# Altium PCB tkhtn.PcbDoc
Units mil, origin at the board's own origin, x right, y up, seen from the top; angles counter-clockwise.
Board outline 6000 x 4000 mil, 2 copper layers (Top Layer, Bottom Layer); 33 components, 30 nets, 170 pads, 0 vias.
Unrouted connection lines stored in the file: 10.
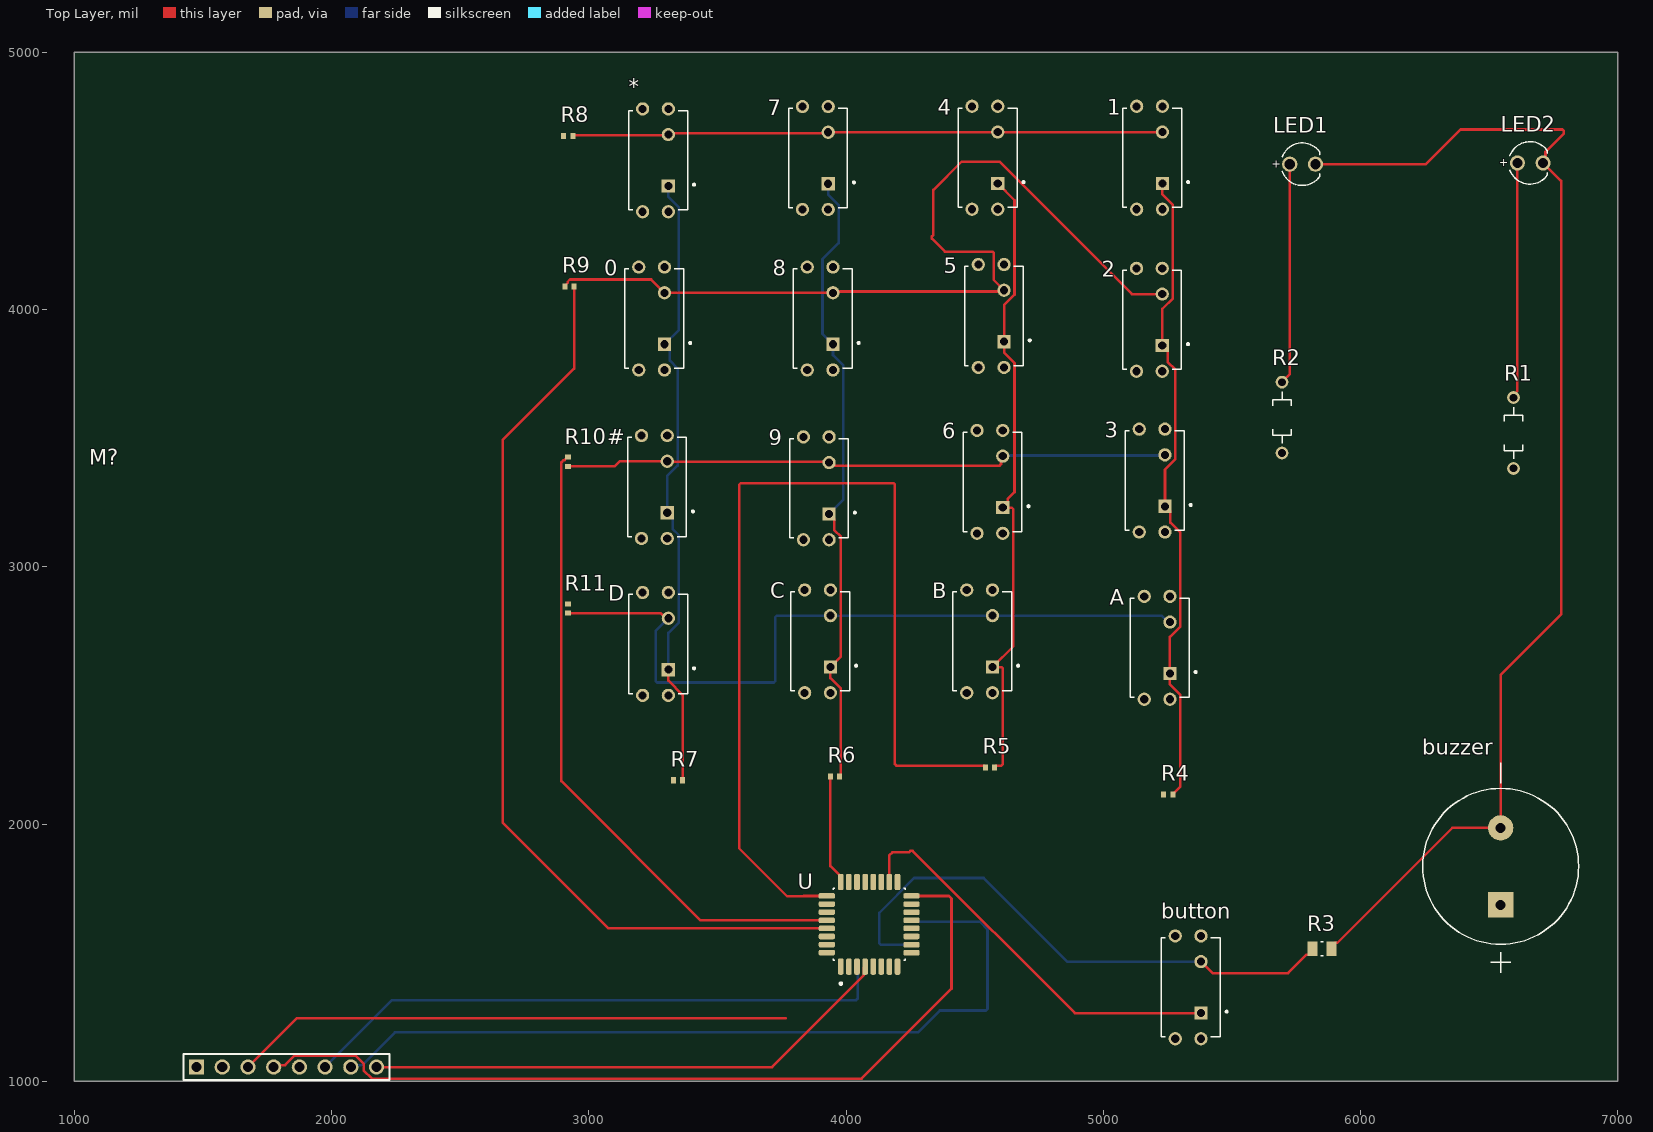
[diagram p0: Top Layer view]
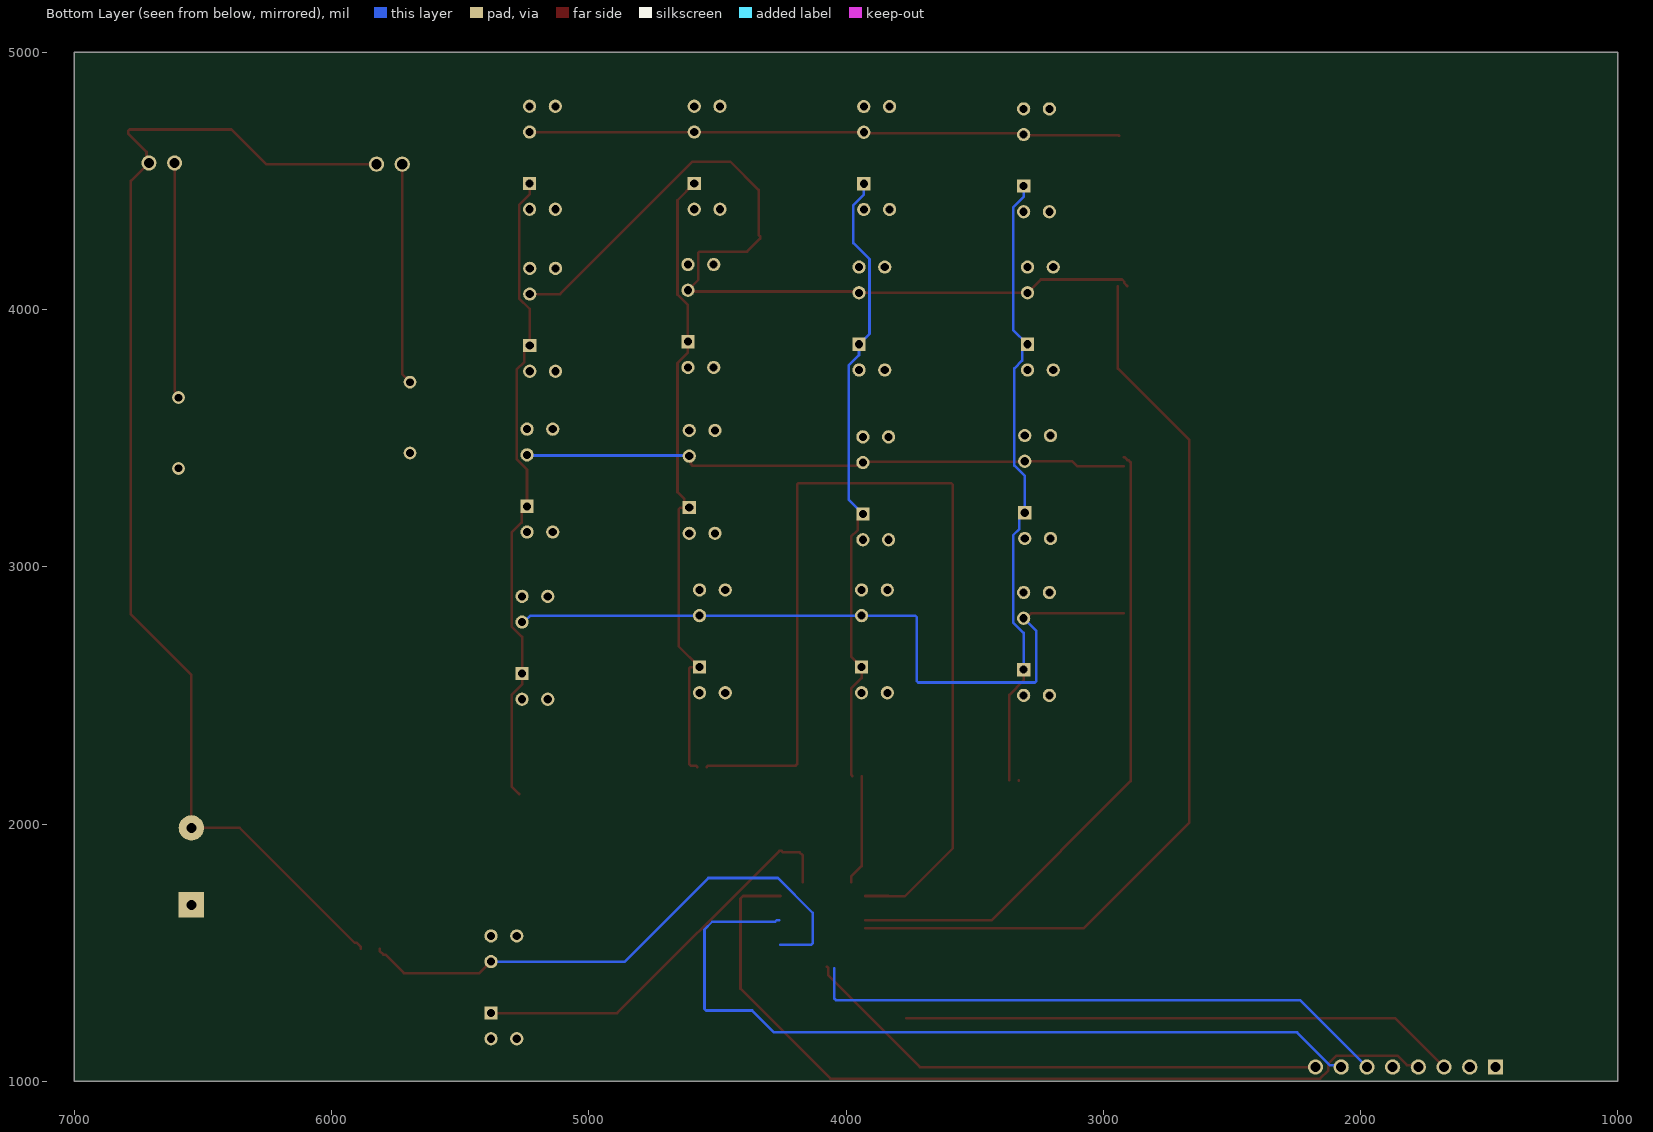
[diagram p1: Bottom Layer view, seen from below]

## Layer stack, top to bottom
Top Solder: solder mask 0.4, Solder Resist, Dk 3.5
Top Layer: signal copper 1.4
Dielectric 1: dielectric 12.6, FR-4, Dk 4.8
Bottom Layer: signal copper 1.4
Bottom Solder: solder mask 0.4, Solder Resist, Dk 3.5

## Board outline
1000,1000 7000,1000 7000,5000 1000,5000

## Design rules (kind name [scope] priority, off if disabled: settings)
Clearance [All] p1: gap=10 ignorepadtopadclearanceinfootprint=FALSE
PolygonConnect [All] p1: connectstyle=Relief reliefconductorwidth=10 reliefentries=4 polygonreliefangle="90 Angle" airgapwidth=10
RoutingVias [All] p1: holewidth=28 width=50 viastyle="Through Hole" minholewidth=28 minwidth=50 maxholewidth=28 maxwidth=50
SolderMaskExpansion [All] p1: expansion=4 istentingtop=FALSE
Width [All] p1: maxlimit=10 minlimit=10 preferedwidth=10
30 further rules are at their usual default settings.

## Components (designator, comment, footprint, x,y, rotation, side; value= is the part's Value field where it differs from the comment)
0 "" SW_MPB01-1B33-SB-D 3255,3965 r90 top
1 "" SW_MPB01-1B33-SB-D 5190.63,4590 r90 top
2 "" SW_MPB01-1B33-SB-D 5190,3960 r90 top
3 "" SW_MPB01-1B33-SB-D 5200.63,3335 r90 top
4 "" SW_MPB01-1B33-SB-D 4550.63,4590 r90 top
5 "" SW_MPB01-1B33-SB-D 4575,3975 r90 top
6 "" SW_MPB01-1B33-SB-D 4570,3330 r90 top
7 "" SW_MPB01-1B33-SB-D 3891.38,4589 r90 top
8 "" SW_MPB01-1B33-SB-D 3910,3965 r90 top
9 "" SW_MPB01-1B33-SB-D 3895,3305 r90 top
# "" SW_MPB01-1B33-SB-D 3265.63,3310 r90 top
* "" SW_MPB01-1B33-SB-D 3270,4580 r90 top
A "" SW_MPB01-1B33-SB-D 5220,2685 r90 top
B "" SW_MPB01-1B33-SB-D 4530,2710 r90 top
button "" SW_MPB01-1B33-SB-D 5340.63,1365 r90 top
buzzer "" XDCR_CPI-1514-12-95T 6545,1835.39 r90 top
C "" SW_MPB01-1B33-SB-D 3900,2710 r90 top
D "" SW_MPB01-1B33-SB-D 3270,2700 r90 top
LED1 "Super Red, 2V, 40°" WL-TMRC_D3.95H5.3 5775,4565 r0 top
LED2 "Bright Green, 2.2V, 60°" WL-TMRC_D3.95H5.3 6660,4570 r0 top
M? "RFID-RC522" RFID-RC522 1825,1055 r0 top
R1 "220ohm" RESAD700W45L350D185 6595,3520 r90 top
R2 "220ohm" RESAD700W45L350D185 5695,3580 r90 top
R3 "1Kohm" RESC2012X65N 5850,1515 r0 top
R4 "100ohm" RESC1005X35N 5252.99,2115 r0 top
R5 "100ohm" RESC1005X35N 4560,2220 r0 top
R6 "100ohm" RESC1005X35N 3957.01,2185 r0 top
R7 "100ohm" RESC1005X35N 3347.01,2170 r0 top
R8 "100ohm" RESC1005X35N 2920,4675 r0 top
R9 "100ohm" RESC1005X35N 2925,4090 r0 top
R10 "100ohm" RESC1005X35N 2920,3407.99 r90 top
R11 "100ohm" RESC1005X35N 2920,2837.99 r90 top
U "ATMEGA328P-AUR" QFP80P900X900X120-32N 4090,1610 r90 top

## Footprints (in the part's own frame and the unit in brackets; to place one, negate y for a bottom-side part, rotate by r counter-clockwise, add the part's x,y. Pads: shape width x height; smd on the part's side, far side on the other; paste and mask are expansions set on the pad)
QFP80P900X900X120-32N [mm]
  rrect53% 1.6x0.55 smd: 1(-4.18,2.8) 2(-4.18,2) 3(-4.18,1.2) 4(-4.18,0.4) 5(-4.18,-0.4) 6(-4.18,-1.2) 7(-4.18,-2) 8(-4.18,-2.8) 17(4.18,-2.8) 18(4.18,-2) 19(4.18,-1.2) 20(4.18,-0.4) 21(4.18,0.4) 22(4.18,1.2) 23(4.18,2) 24(4.18,2.8)
  rrect53% 0.55x1.6 smd: 9(-2.8,-4.18) 10(-2,-4.18) 11(-1.2,-4.18) 12(-0.4,-4.18) 13(0.4,-4.18) 14(1.2,-4.18) 15(2,-4.18) 16(2.8,-4.18) 25(2.8,4.18) 26(2,4.18) 27(1.2,4.18) 28(0.4,4.18) 29(-0.4,4.18) 30(-1.2,4.18) 31(-2,4.18) 32(-2.8,4.18)
  silkscreen extent -5.95,-3.55 3.55,3.55
RESAD700W45L350D185 [mm]
  round 1.258 hole 0.75: 1(-3.5,0) 2(3.5,0)
  silkscreen extent -2.55,-0.92 2.55,0.92
RESC1005X35N [mm]
  rect 0.49x0.6 smd: 1(-0.457,0) 2(0.457,0)
RESC2012X65N [mm]
  rect 1x1.42 smd: 1(-0.935,0) 2(0.935,0)
  silkscreen extent -0.12,-0.7 0.12,0.7
RFID-RC522 [mm]
  rect 1.508x1.508 / inner round 1.508 / far side rect 1.508x1.508 hole 1: 1(-8.89,0)
  round 1.508 hole 1: 2(-6.35,0) 3(-3.81,0) 4(-1.27,0) 5(1.27,0) 6(3.81,0) 7(6.35,0) 8(8.89,0)
  silkscreen extent -10.19,-1.3 10.19,1.3
SW_MPB01-1B33-SB-D [mm]
  rect 1.308x1.308 / inner round 1.308 / far side rect 1.308x1.308 hole 0.8: 1(-2.54,-1)
  round 1.308 hole 0.8: 3(2.54,-1) S1(5.08,-1) S2(-5.08,-1) S3(5.08,1.54) S4(-5.08,1.54)
  silkscreen extent -4.9,-3.64 4.9,2.9
WL-TMRC_D3.95H5.3 [mm] "THT Mono-color Round Color LED, 2-leads"
  round 1.5 hole 1: 1(-1.27,0) 2(1.27,0)
  silkscreen extent -2,-2.1 1.69,2.1, body extent -1.99,-1.97 1.63,1.97, height 5.35
XDCR_CPI-1514-12-95T [mm]
  round 2.5 hole 1: N(3.8,0)
  rect 2.5x2.5 / inner round 2.5 / far side rect 2.5x2.5 hole 1: P(-3.8,0)
  silkscreen extent -10.49,-7.7 10.22,7.7

## Part data
0 1 2 3 4 5 6 7 8 9 # * A B button C D: library part MPB01-1B33-SB-D, "Single Pole, Through Hole, 0 mm, 3.3 mm, and 5.4 mm Push, Off-(ON) and On-(ON), 2.54 and 5.08 mm Pitch, Push Button Switch", Package=None, Availability=Unavailable, MP=MPB01-1B33-SB-D, Price=None
buzzer: library part CPI-1514-12-95T, Package=None, Availability=Unavailable, MP=CPI-1514-12-95T, Price=None
LED1: library part 151031SS04000, "WL-TMRC Mono-color Round Color, THT, D3.95 x H5.3mm, Super Red, 2V, 40°", Case/Size Code=3mm, Emitting Color="Super Red", Forward Voltage=2V, Manufacturer="Wurth Elektronik", Operating Temperature Max=85°C, Operating Temperature Min=-40°C, Category="Signal LEDs", Chip Technology=AlInGaP, ComponentLink1Description="Website Link", ComponentLink1URL=https://www.we-online.com/redexpert/article/151031SS04000?ad, ComponentLink2Description="Datasheet Link", ComponentLink2URL=https://www.we-online.com/redexpert/spec/151031SS04000?ad, Diameter=3.95mm, Dominant Wavelength=635nm, Height=5.3mm, Luminous Intensity=160mcd, Manufacturer Part Number=151031SS04000, Match Code=WL-TMRC, Mount="Through Hole", Packaging=Bulk, Peak Wavelength=640nm, Viewing Angle=40°
LED2: library part 151031VS06000, "WL-TMRC Mono-color Round Color, THT, D3.95 x H5.3mm, Bright Green, 2.2V, 60°", Case/Size Code=3mm, Emitting Color="Bright Green", Forward Voltage=2.2V, Manufacturer="Wurth Elektronik", Operating Temperature Max=85°C, Operating Temperature Min=-40°C, Category="Signal LEDs", Chip Technology=GaAsP/GaP, ComponentLink1Description="Website Link", ComponentLink1URL=https://www.we-online.com/redexpert/article/151031VS06000?ad, ComponentLink2Description="Datasheet Link", ComponentLink2URL=https://www.we-online.com/redexpert/spec/151031VS06000?ad, Diameter=3.95mm, Dominant Wavelength=568nm, Height=5.3mm, Luminous Intensity=30mcd, Manufacturer Part Number=151031VS06000, Match Code=WL-TMRC, Mount="Through Hole", Packaging=Bulk, Peak Wavelength=560nm, Viewing Angle=60°
M?: "Bá»™ cÃ´ng cá»¥ phÃ¡t triá»ƒn trong IC Ä‘áº§u Ä‘á»c/ghi tÃ­ch há»£p MFRC522 Ä‘á»ƒ liÃªn láº¡c khÃ´ng tiáº¿p xÃºc á»Ÿ táº§n sá»‘ 13,56 MHz.", Package=Package, Check_prices=https://www.snapeda.com/parts/RFID-RC522/Handson+Technology/view-part/?ref=eda, MF="Handson Technology", MP=RFID-RC522, SnapEDA_Link=https://www.snapeda.com/parts/RFID-RC522/Handson+Technology/view-part/?ref=snap
R1 R2: library part 4-1623927-9, "Through Hole Carbon Film Resistor, Cfr Series, 220 Ohm, 250 Mw, - 5%, 200 V, Axial Leaded", Package=None, Availability=Warning, EU_RoHS_Compliance=Compliant, MF="TE Connectivity", MP=4-1623927-9, Price=None, SnapEDA_Link=https://www.snapeda.com/parts/4-1623927-9/TE%20Connectivity/view-part/2381393/?ref=snap
R3: library part CPF0805B1K0E, "CPF0805 1K0 0.1% 25PPM 5K RL", Package=0805, Power_Rating=".1 W", Resistance=1K, Tolerance=.1%, Voltage_Rating="100 V", Availability=Unavailable, EU_RoHS_Compliance=Compliant, MF="TE Connectivity", MP=CPF0805B1K0E, Price=None, SnapEDA_Link=https://www.snapeda.com/parts/CPF0805B1K0E/TE%20Connectivity/view-part/2531918/?ref=snap, TE_purchase_URL=https://www.te.com/usa-en/product-1614902-2.html?te_bu=Cor&te_type=disp&te_campaign=seda_glo_cor-seda-global-disp-prtnr-fy19-seda-model-bom-cta_sma-317_1&elqCampaignId=32493
R4 R5 R6 R7 R8 R9 R10 R11: library part CPF0402B100RE1, "CPF 0402 100R 0.1% 25PPM 1K RL", Package=None, Availability=Unavailable, MP=CPF0402B100RE1, Price=None
U: "AVR AVRÂ® ATmega Microcontroller IC 8-Bit 20MHz 32KB _16K x 16_ FLASH 32-TQFP _7x7_", Package="TQFP-32 Microchip", Digi-Key_Part_Number=ATMEGA328P-AURCT-ND, Digi-Key_Purchase_URL=https://www.digikey.com/product-detail/en/microchip-technology/ATMEGA328P-AUR/ATMEGA328P-AURCT-ND/3789455?utm_source=snapeda&utm_medium=aggregator&utm_campaign=symbol, MF=Microchip, MP=ATMEGA328P-AUR, SnapEDA_Link=https://www.snapeda.com/parts/ATMEGA328P-AUR/Microchip/view-part/1212624/?ref=snap

## Nets (pads, with @x,y where several pads share a name; then routed paths per layer and width w, separated by ;. In a path a pad name is that pad's centre, name@x,y a point inside that pad or via, vN(x,y) a via of type N, cw(c..) or ccw(c..) an arc to the next point about the centre after c; other vN are vias at no path point)
3.3V: M?.8 U.4 | length 2077.8
  Top Layer w10: M?.8 3712.5,1055 4068.88,1411.38 4068.88,1440.06 U.4
5V: button.1 U.18 | length 1583.8
  Top Layer w10: U.18 4168.74,1878.74 4180,1890 4245,1890 4250.86,1895.86 4259.14,1895.86 4890,1265 button.1
A0: R7.1 U.23 | length 2.2
  Top Layer w10: R7.1@3329.02,2167.83 R7.1
A1: R6.1 U.24 | length 427.3
  Top Layer w10: R6.1 3939.02,1835.98 3979.76,1795.24 U.24
A2: R5.1 U.25 | length 3886.9
  Top Layer w10: U.25 3835.47,1720.24 3834.38,1719.14 3770.86,1719.14 3585,1905 3585,3319.14 3590.86,3325 4184.14,3325 4190,3319.14 4190,2232.67 4195.86,2226.81 4537.36,2226.81 4542.01,2222.17 R5.1
A3: R4.1 U.26
A4: U.27
A5: R10.2 U.28 | length 2530.6
  Top Layer w10: R10.2 2917.83,3425.98 2906.5,3414.65 2901.98,3414.65 2893.19,3405.86 2893.19,2166.81 3434.25,1625.75 U.28
A6: R9.2 U.29 | length 3630.7
  Top Layer w10: R9.2 2942.99,3770.41 2665,3492.42 2665,2005 3075,1595 3924.69,1595 U.29
A7: R8.1
D2: buzzer.P U.32
D4: R1.1
D5: R2.1 U.9
D6: button.3 R3.1 U.10 | length 2183.1
  Top Layer w10: button.3 5425,1420 5718.19,1420 5790.24,1492.05 5798.5,1492.05 5813.19,1506.73 R3.1
  Bottom Layer w10: 4255,1530 4135.86,1530 4130,1535.86 4130,1655 4265,1790 4535,1790 4860,1465 button.3
GND: buzzer.N LED1.2 LED2.2 M?.6 R3.2 U.3 | length 7050.1
  Top Layer w10: LED1.2 6254.14,4565 6389.14,4700 6785,4700 6790.86,4694.14 6790.86,4684.13 6719.39,4612.66 6719.39,4579.39 LED2.2 6780,4500 6780,2815 6545,2580 buzzer.N 6356.81,1985 5909.76,1537.95 5901.5,1537.95 5886.81,1523.27 R3.2
  Bottom Layer w10: M?.6 2235,1315 4039.14,1315 4045,1320.86 4045,1440
MISO: M?.4 U.16 | length 3360.5
  Top Layer w10: M?.4 1782.88,1062.88 1819.69,1062.88 1856.49,1099.69 2093.51,1099.69 2125,1068.19 2125,1041.81 2156.49,1010.31 4060.31,1010.31 4410,1360 4410,1710 4400,1720 4254.8,1720 U.16
MOSI: M?.3 U.15 | length 2168.7
  Top Layer w10: M?.3 1865,1245 3765,1245
Net0_1: 0.1 #.1 *.1 D.1 R7.2 | length 2446.7
  Top Layer w10: D.1 3309.37,2557.63 3365,2502 R7.2
  Bottom Layer w10: D.1 3309.37,2742.37 3350.12,2783.12 3350.12,3122.51 3325.75,3146.88 3325.75,3189.25 #.1 3305,3352.37 3345.75,3393.12 3345.75,3771.25 3315.12,3801.88 3315.12,3844.25 0.1 3350.12,3920.75 3350.12,4396.88 3309.37,4437.63 *.1
Net0_3: 0.3 2.3 5.3 8.3 R9.1 | length 3513.8
  Top Layer w10: R9.1 2907.01,4092.17 2918.35,4103.5 2918.35,4108.02 2927.13,4116.81 3242.56,4116.81 0.3 8.3 3954.37,4070 4609.37,4070 5.3 4573.62,4115.75 4573.62,4191.88 4575,4193.26 4575,4219.14 4569.14,4225 4385,4225 4334.14,4275.86 4334.14,4284.14 4340,4290 4340,4465 4450,4575 4596.57,4575 5111.57,4060 2.3
Net1_1: 1.1 2.1 3.1 A.1 R4.2 | length 2517.9
  Top Layer w10: 1.1 5230,4447.63 5270.75,4406.88 5270.75,4043.75 5230,4003 5230,3860.63 2.1 5250.12,3839.25 5250.12,3796.88 5280.75,3766.25 5280.75,3418.12 5240,3377.37 3.1 5260.75,3214.25 5260.75,3171.88 5300.12,3132.51 5300.12,2768.12 5259.37,2727.37 A.1 5259.37,2542.63 5300.12,2501.88 5300.12,2146.3 5270.98,2117.17 R4.2
Net1_3: 1.3 4.3 7.3 *.3 R8.2 | length 2298.2
  Top Layer w10: R8.2 2940.49,4677.5 3306.87,4677.5 *.3 3313.87,4684.5 3926.25,4684.5 7.3 3931.25,4689.5 4589.5,4689.5 4.3 1.3
Net3_3: 3.3 6.3 9.3 #.3 R10.1 | length 2366.7
  Top Layer w10: R10.1 3100.29,3390 3120.29,3410 #.3 3307.5,3407.5 3943.1,3407.5 3957.34,3393.26 4596.77,3393.26 4602.63,3399.11 4602.63,3423.26 6.3
  Bottom Layer w10: 6.3 4611.87,3432.5 5237.5,3432.5 3.3
Net4_1: 4.1 5.1 6.1 B.1 R5.2 | length 2483.7
  Top Layer w10: R5.2 4577.99,2222.17 4582.64,2226.81 4604.26,2226.81 4610.12,2232.67 4610.12,2604.14 4604.26,2610 B.1 4650.12,2690.75 4650.12,3224.14 4644.26,3230 6.1 4628.54,3249.17 4628.54,3263.54 4655.12,3290.12 4655.12,3791.88 4614.37,3832.63 5.1 4614.37,4017.37 4655.12,4058.12 4655.12,4424.88 4.1
Net7_1: 7.1 8.1 9.1 C.1 R6.2 | length 2458.6
  Top Layer w10: 9.1 3955.12,3184.25 3955.12,3141.88 3980.12,3116.88 3980.12,2650.75 C.1 3939.37,2567.63 3980.12,2526.88 3980.12,2192.28 3975,2187.17 R6.2
  Bottom Layer w10: 7.1 3930.75,4446.63 3971.5,4405.88 3971.5,4258.44 3908.62,4195.56 3908.62,3905.75 8.1 3949.37,3822.63 3990.12,3781.88 3990.12,3260.75 9.1
NetA_3: A.3 B.3 C.3 D.3 R11.1 | length 2927.5
  Top Layer w10: R11.1 3278.14,2820 3298.14,2800 D.3
  Bottom Layer w10: D.3 3260,2750.63 3260,2555.86 3265.86,2550 3719.14,2550 3725,2555.86 3725,2804.14 3730.86,2810 B.3 5226.74,2810 5251.74,2785 A.3
NetLED1_1: LED1.1 R2.2 | length 859.6
  Top Layer w10: R2.2 5725,3747.8 LED1.1
NetLED2_1: LED2.1 R1.2 | length 918.4
  Top Layer w10: R1.2 6595,3668.49 6610,3683.49 LED2.1
RST: M?.7 U.13 | length 3182.2
  Bottom Layer w10: M?.7 2082.88,1062.88 2119.69,1062.88 2246.81,1190 4280,1190 4365,1275 4544.14,1275 4550,1280.86 4550,1590 4520,1620 4275,1620 4270,1625 4260,1625
SCK: M?.2
SDA: M?.1 U.14
pads on no net: 0.S1 0.S2 0.S3 0.S4 1.S1 1.S2 1.S3 1.S4 2.S1 2.S2 2.S3 2.S4 3.S1 3.S2 3.S3 3.S4 4.S1 4.S2 4.S3 4.S4 5.S1 5.S2 5.S3 5.S4 6.S1 6.S2 6.S3 6.S4 7.S1 7.S2 7.S3 7.S4 8.S1 8.S2 8.S3 8.S4 9.S1 9.S2 9.S3 9.S4 #.S1 #.S2 #.S3 #.S4 *.S1 *.S2 *.S3 *.S4 A.S1 A.S2 A.S3 A.S4 B.S1 B.S2 B.S3 B.S4 button.S1 button.S2 button.S3 button.S4 C.S1 C.S2 C.S3 C.S4 D.S1 D.S2 D.S3 D.S4 M?.5 R11.2 U.1 U.2 U.5 U.6 U.7 U.8 U.11 U.12 U.17 U.19 U.20 U.21 U.22 U.30 U.31

## Text inside footprints (layer, text, board x,y; h text height)
LED1: Top Overlay "+" at 5654.92,4551.22 h31.5
LED2: Top Overlay "+" at 6539.92,4556.22 h31.5